# Altium PCB Export_PCB.PcbDoc (part 4 of 7)
Units mm, origin at the board's own origin, x right, y up, seen from the top; angles counter-clockwise.
Board outline 93 x 90 mm, 6 copper layers (Top_1, GND_2, SIGNAL_3, PWR_4, GND_5, Bottom_6), stack 1.606 mm thick; 470 components, 374 nets, 2145 pads, 1031 vias.
Unrouted connection lines stored in the file: 451.
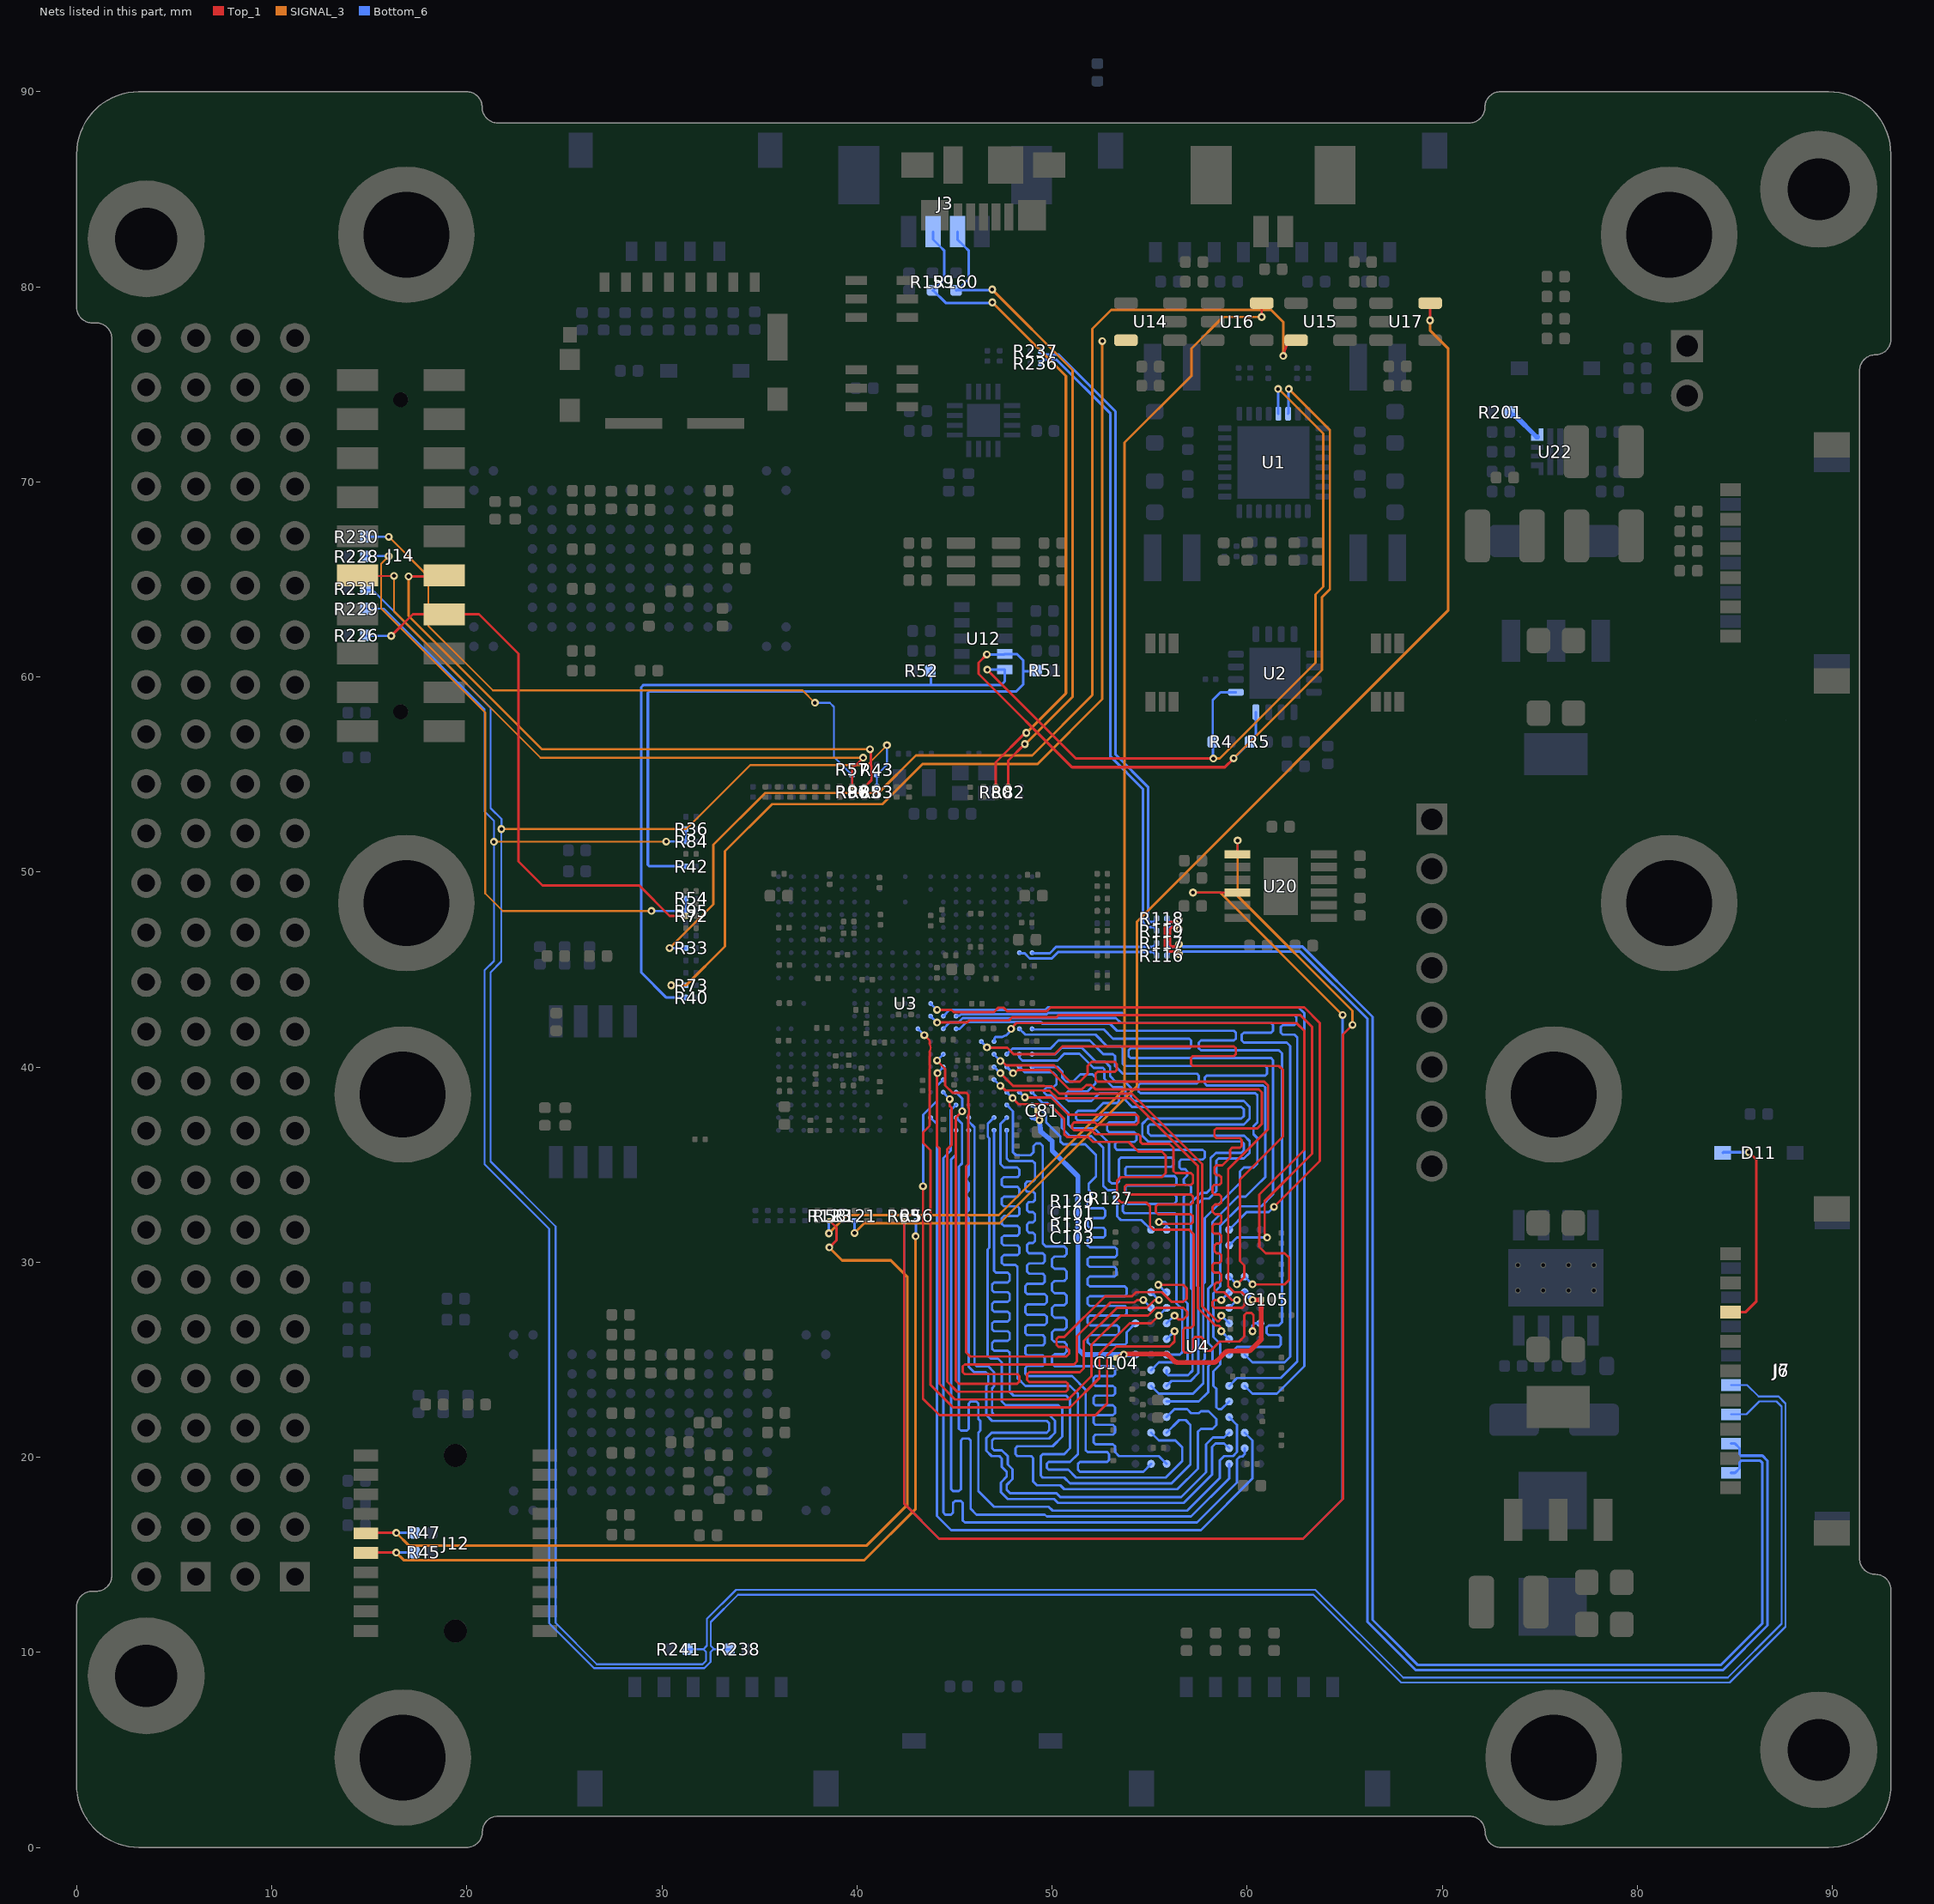
[diagram p6: the nets of this part, all layers, seen from the top]

## Via types
v1: diameter 0.4, hole 0.2, Top_1 to Bottom_6, 870 vias
v2: diameter 0.4, hole 0.2, Top_1 to Bottom_6, tented both sides, 160 vias
v3: diameter 0.4, hole 0.15, Top_1 to Bottom_6, 1 vias

## Nets (pads, with @x,y where several pads share a name; then routed paths per layer and width w, separated by ;. In a path a pad name is that pad's centre, name@x,y a point inside that pad or via, vN(x,y) a via of type N, cw(c..) or ccw(c..) an arc to the next point about the centre after c; other vN are vias at no path point) (continued)
DDR_A10: U3.T3 U4.L7 | length 34.1
  Top_1 w0.125: v1(48.003,39.687) 48.084,39.687 48.245,39.847 49.893,39.847 50.878,38.862 51.528,38.862 51.753,39.087 52.003,39.087 52.228,38.862 60.603,38.862 60.753,38.712 60.753,37.087 60.528,36.862 58.428,36.862 58.328,36.762 58.328,36.462 58.428,36.362 59.628,36.362 59.728,36.262 59.728,35.962 59.628,35.862 59.228,35.862 59.128,35.762 59.128,35.362 58.728,34.962 58.428,34.962 58.328,34.862 58.328,34.562 58.428,34.462 58.578,34.462 58.678,34.362 58.678,34.062 58.578,33.962 58.328,33.962 58.228,33.862 58.228,33.562 58.328,33.462 58.578,33.462 58.678,33.362 58.678,33.062 58.578,32.962 58.428,32.962 58.353,32.962 58.228,32.837 58.228,32.587 58.353,32.462 58.578,32.462 58.678,32.362 58.678,32.062 58.578,31.962 58.328,31.962 58.228,31.862 58.228,31.562 58.328,31.462 58.578,31.462 58.678,31.362 58.678,31.062 58.578,30.962 58.428,30.962 58.328,30.862 58.328,30.562 58.428,30.462 58.578,30.462 58.678,30.362 58.678,30.062 58.578,29.962 58.328,29.962 58.228,29.862 58.228,29.562 58.328,29.462 58.578,29.462 58.678,29.362 58.678,29.062 58.578,28.962 58.428,28.962 58.328,28.862 58.328,28.562 58.428,28.462 58.828,28.462 59.228,28.062 v1(59.478,28.062)
  Bottom_6 w0.125: U3.T3@47.678,40.012 v1(48.003,39.687) ; U4.L7@59.078,27.662 v1(59.478,28.062)
DDR_A11: U3.M9 U4.R7 | length 34.1
  Top_1 w0.125: v1(44.103,42.287) 45.658,42.287 45.765,42.393 47.784,42.393 47.953,42.562 50.228,42.562 50.328,42.662 62.728,42.662 63.328,42.062 63.328,35.562 60.897,33.131 60.897,31.471 61.028,31.339 v1(61.028,31.262)
  Bottom_6 w0.125: U3.M9@43.778,42.612 v1(44.103,42.287) ; U4.R7@59.078,30.862 59.478,31.262 v1(61.028,31.262)
DDR_A12: U3.P5 U4.N7 | length 34.1
  Top_1 w0.125: v1(46.664,41.013) 46.69,40.987 47.703,40.987 48.028,40.662 50.128,40.662 50.528,41.062 59.328,41.062 59.428,40.962 59.428,40.662 59.328,40.562 57.228,40.562 57.128,40.462 57.128,40.162 57.228,40.062 61.628,40.062 61.828,39.862 61.828,36.437 59.628,34.237 59.628,30.062 59.853,29.837 59.853,29.237 v1(59.478,28.862)
  Bottom_6 w0.125: U3.P5@46.378,41.312 46.378,41.305 46.664,41.02 v1(46.664,41.013) ; U4.N7@59.078,29.262 v1(59.478,28.862)
DDR_A13: U3.V2 U4.T3 | length 34
  Top_1 w0.125: v1(48.61,38.452) 48.623,38.438 49.952,38.438 50.654,37.736 50.828,37.562 54.328,37.562 54.428,37.462 54.428,37.162 54.328,37.062 52.303,37.062 52.203,37.162 51.128,37.162 51.028,37.062 51.028,36.862 51.128,36.762 52.028,36.762 52.228,36.562 54.428,36.562 54.528,36.462 54.528,36.162 54.628,36.062 56.028,36.062 56.228,35.862 56.228,34.662 56.328,34.562 57.128,34.562 57.228,34.462 57.228,34.062 57.128,33.962 53.828,33.962 53.728,33.862 53.728,33.562 53.828,33.462 57.128,33.462 57.228,33.362 57.228,33.062 57.128,32.962 55.428,32.962 55.328,32.862 55.328,32.562 55.428,32.462 57.128,32.462 57.228,32.362 57.228,32.062 57.128,31.962 55.578,31.962 v1(55.478,32.062)
  Bottom_6 w0.125: U3.V2@48.328,38.712 48.339,38.712 48.599,38.452 v1(48.61,38.452) ; v1(55.478,32.062) 55.803,32.062 55.878,31.987 U4.T3@55.878,31.662
DDR_A14: U3.L9 U4.T7 | length 33.9
  Top_1 w0.125: v1(44.103,42.937) 44.853,42.937 44.972,42.818 47.026,42.818 47.262,43.054 47.51,43.054 47.702,42.862 49.728,42.862 49.928,43.062 62.928,43.062 63.728,42.262 63.728,35.187 v1(61.378,32.837)
  Bottom_6 w0.125: U3.L9@43.778,43.262 v1(44.103,42.937) ; U4.T7@59.078,31.662 59.978,32.562 61.103,32.562 v1(61.378,32.837)
DDR_A15: U3.R4 U4.M7 | length 34.1
  Top_1 w0.125: v1(47.353,40.311) 47.421,40.311 47.643,40.088 50.102,40.088 50.928,39.262 51.428,39.262 51.828,39.662 51.828,40.062 52.028,40.262 53.228,40.262 53.325,40.165 53.325,39.859 53.228,39.762 52.328,39.762 52.228,39.662 52.228,39.362 52.328,39.262 60.878,39.262 61.078,39.062 61.078,36.812 59.028,34.762 59.028,28.762 59.328,28.462 59.728,28.462 59.878,28.312 59.878,27.787 59.753,27.662 58.328,27.662 58.228,27.762 58.228,27.962 58.328,28.062 v1(58.678,28.062)
  Bottom_6 w0.125: U3.R4@47.028,40.662 47.028,40.649 47.353,40.324 v1(47.353,40.311) ; v1(58.678,28.062) U4.M7@59.078,28.462
DDR_BA0: U3.V8 U4.M2 | length 34
  Top_1 w0.125: v1(44.754,38.362) 44.753,38.36 44.753,38.012 44.853,37.912 44.853,36.012 44.628,35.787 44.628,23.88 45.146,23.362 50.71,23.362 50.81,23.462 50.81,23.78 50.728,23.862 48.828,23.862 48.728,23.962 48.728,24.262 48.828,24.362 51.428,24.362 51.628,24.562 51.628,25.962 53.328,27.662 54.853,27.662 55.253,28.062 v1(55.478,28.062)
  Bottom_6 w0.125: U3.V8@44.428,38.712 44.428,38.697 44.724,38.401 v1@44.799,38.401 ; U4.M2@55.078,28.462 v1(55.478,28.062)
DDR_BA1: U3.P4 U4.N8 | length 34.1
  Top_1 w0.125: v1(47.902,41.961) 47.902,41.986 48.178,42.262 62.528,42.262 62.928,41.862 62.928,35.762 60.628,33.462 60.628,30.787 60.953,30.462 61.928,30.462 62.153,30.237 62.153,29.087 61.928,28.862 v1(60.278,28.862)
  Bottom_6 w0.125: U3.P4@47.028,41.312 47.045,41.329 47.045,41.484 47.103,41.543 47.427,41.543 47.66,41.637 47.731,41.708 ; 47.731,41.709 47.902,41.88 v1(47.902,41.961) ; U4.N8@59.878,29.262 v1(60.278,28.862)
DDR_BA2: U3.R8 U4.M3 | length 33.8
  Top_1 w0.125: v1(44.103,40.337) 44.524,39.916 44.524,39.061 44.902,38.682 45.608,38.682 45.714,38.576 45.714,37.912 45.743,37.883 45.743,37.593 45.714,37.564 45.714,35.033 45.603,34.921 45.603,34.801 45.603,25.369 45.81,25.162 50.728,25.162 50.878,25.312 50.878,25.512 50.728,25.662 50.328,25.662 50.228,25.762 50.228,26.062 50.328,26.162 50.628,26.162 52.728,28.262 54.103,28.262 54.303,28.462 55.628,28.462 56.128,27.962 56.728,27.962 56.903,28.137 56.903,28.662 56.728,28.837 v1(55.453,28.837)
  Bottom_6 w0.125: v1(44.103,40.337) U3.R8@44.428,40.662 ; v1(55.453,28.837) U4.M3@55.853,28.437
DDR_CAS: U3.T8 U4.K3 | length 34
  Top_1 w0.125: v1(44.132,39.689) 44.103,39.66 44.103,35.962 44.228,35.837 44.228,23.762 45.028,22.962 50.828,22.962 52.028,24.162 52.028,25.762 53.528,27.262 54.928,27.262 55.328,27.662 56.728,27.662 56.928,27.462 56.928,27.262 56.728,27.062 56.478,27.062 v1(56.278,27.262)
  Bottom_6 w0.125: v1(44.132,39.689) 44.132,39.703 44.428,39.999 U3.T8@44.428,40.012 ; U4.K3@55.878,26.862 v1(56.278,27.262)
DDR_CK_N: U3.T4 U4.K7 | length 22.1
  Top_1 w0.125: v1(47.353,39.687) 48.01,39.03 49.604,39.03 49.606,39.028 49.968,39.028 49.998,38.998 50.008,38.998 50.369,38.637 50.654,38.637 50.658,38.633 54.096,38.633 57.705,35.024 57.705,27.739 58.468,26.975 58.551,26.975 58.621,27.045 58.621,27.205 v1(58.678,27.262)
  Bottom_6 w0.125: U3.T4@47.028,40.012 v1(47.353,39.687) ; v1(58.678,27.262) U4.K7@59.078,26.862
DDR_CK_P: U3.U4 U4.J7 | length 21.9
  Top_1 w0.125: v1(47.353,39.037) 47.379,39.037 47.614,38.803 49.51,38.803 49.512,38.801 49.874,38.801 50.272,38.403 50.654,38.403 50.658,38.406 54.002,38.406 57.478,34.93 57.478,27.645 58.374,26.748 58.551,26.748 58.621,26.679 58.621,26.519 v1(58.678,26.462)
  Bottom_6 w0.125: U3.U4@47.028,39.362 v1(47.353,39.037) v1@47.378,39.037 ; v1(58.678,26.462) U4.J7@59.078,26.062
DDR_CKE: U3.V3 U4.K9 | length 34
  Top_1 w0.125: v1(47.978,38.412) 48.289,38.101 49.887,38.101 50.039,37.949 50.039,37.926 50.628,37.337 50.628,36.562 50.778,36.412 51.853,36.412 52.103,36.162 53.928,36.162 54.428,35.662 55.628,35.662 55.828,35.462 55.828,34.562 55.628,34.362 53.528,34.362 53.328,34.162 53.328,33.262 53.528,33.062 54.828,33.062 55.028,32.862 55.028,31.837 55.203,31.662 57.028,31.662 57.253,31.437 57.253,26.762 57.128,26.637 56.828,26.637 56.728,26.537 56.728,25.462 56.828,25.362 57.128,25.362 57.228,25.462 57.228,26.062 57.328,26.162 57.653,26.162 57.753,26.062 57.753,25.587 57.878,25.462 58.128,25.462 58.603,25.937 59.603,25.937 59.853,26.187 59.853,27.276 59.969,27.392 60.223,27.392 60.328,27.287 60.328,26.512 v1(60.278,26.462)
  Bottom_6 w0.125: U3.V3@47.678,38.712 v1(47.978,38.412) ; v1(60.278,26.462) 60.278,26.762 60.378,26.862 U4.K9@60.678,26.862
DDR_CS: U3.V7 U4.L2 | length 34
  Top_1 w0.125: v1(45.392,37.738) 45.074,37.421 45.074,23.916 45.228,23.762 48.203,23.762 48.328,23.887 48.328,24.162 48.228,24.262 45.528,24.262 45.428,24.362 45.428,24.662 45.528,24.762 51.128,24.762 51.278,24.912 51.278,26.212 53.003,27.937 54.228,27.937 54.353,28.062 v1(54.678,28.062)
  Bottom_6 w0.125: U3.V7@45.078,38.712 45.4,38.39 45.4,37.746 v1(45.392,37.738) ; v1(54.678,28.062) U4.L2@55.078,27.662
DDR_D0: U3.N2 U4.E3 | length 40.6
  Bottom_6 w0.125: U3.N2@48.328,41.962 48.628,41.662 49.828,41.662 52.228,41.662 52.828,41.062 53.528,41.062 53.628,40.962 53.628,40.162 53.728,40.062 60.928,40.062 61.028,39.962 61.028,39.662 60.928,39.562 57.928,39.562 57.828,39.462 57.828,39.162 57.928,39.062 60.828,39.062 60.928,38.962 60.928,34.362 60.428,33.862 59.928,33.362 59.528,33.362 58.228,32.062 58.228,28.862 58.003,28.637 58.003,25.862 58.228,25.637 58.228,24.887 58.003,24.662 58.003,23.337 57.528,22.862 U4.E3@55.878,22.862
DDR_D1: U3.M7 U4.F7 | length 40.7
  Bottom_6 w0.125: U3.M7@45.078,42.612 45.107,42.641 45.272,42.641 45.346,42.714 49.73,42.714 49.795,42.779 49.995,42.779 53.611,42.779 53.728,42.662 62.428,42.662 62.528,42.562 62.528,42.262 62.428,42.162 61.828,42.162 61.728,42.062 61.728,41.762 61.828,41.662 62.428,41.662 62.571,41.519 62.571,24.905 61.728,24.062 59.478,24.062 U4.F7@59.078,23.662
DDR_D2: U3.R3 U4.F2 | length 40.6
  Bottom_6 w0.125: U3.R3@47.678,40.662 47.969,40.953 49.919,40.953 50.328,41.362 51.928,41.362 52.628,40.662 53.128,40.662 53.228,40.562 53.228,40.062 53.628,39.662 57.428,39.662 57.528,39.562 57.528,39.262 57.428,39.162 54.528,39.162 54.428,39.062 54.428,38.762 54.528,38.662 60.428,38.662 60.528,38.562 60.528,37.162 60.328,36.962 60.328,36.562 60.528,36.362 60.528,35.062 60.328,34.862 59.828,34.862 59.628,34.662 59.628,34.062 57.828,32.262 57.828,28.962 57.753,28.887 57.753,25.537 57.828,25.462 57.828,25.037 57.753,24.962 57.753,23.787 57.228,23.262 55.478,23.262 U4.F2@55.078,23.662
DDR_D3: U3.M8 U4.F8 | length 40.7
  Bottom_6 w0.125: U3.M8@44.428,42.612 44.74,42.924 49.64,42.924 49.777,43.062 62.628,43.062 62.928,42.762 62.928,24.662 61.528,23.262 60.278,23.262 U4.F8@59.878,23.662
DDR_D4: U3.T2 U4.H3 | length 40.7
  Bottom_6 w0.125: U3.T2@48.328,40.012 48.612,39.728 50.044,39.728 50.228,39.544 50.228,39.122 50.068,38.962 49.728,38.962 49.603,38.837 49.603,38.687 49.728,38.562 49.928,38.562 50.828,37.662 50.828,37.062 51.028,36.862 52.178,36.862 52.928,36.112 52.928,34.162 53.053,34.037 53.328,34.037 53.428,34.137 53.428,35.262 53.528,35.362 56.128,35.362 56.228,35.262 56.228,34.987 56.128,34.887 53.828,34.887 53.753,34.812 53.753,34.487 53.828,34.412 56.278,34.412 56.378,34.312 56.378,34.037 56.278,33.937 53.828,33.937 53.753,33.862 53.753,33.537 53.828,33.462 56.278,33.462 56.378,33.362 56.378,33.112 56.278,33.012 ; U4.H3@55.878,25.262 56.553,25.262 56.678,25.387 56.678,27.587 56.378,27.887 56.378,32.412 56.278,32.512 53.728,32.512 53.628,32.612 53.628,32.887 53.728,32.987 56.278,32.987
DDR_D5: U3.N8 U4.H8 | length 40.7
  Bottom_6 w0.125: U3.N8@44.428,41.962 44.753,42.287 45.203,42.287 45.429,42.513 49.977,42.513 49.978,42.512 53.278,42.512 53.528,42.262 61.228,42.262 61.328,42.162 61.328,41.862 61.228,41.762 59.828,41.762 59.728,41.662 59.728,41.362 59.828,41.262 62.028,41.262 62.213,41.077 62.213,25.147 61.928,24.862 60.278,24.862 U4.H8@59.878,25.262
DDR_D6: U3.T1 U4.G2 | length 40.7
  Bottom_6 w0.125: U3.T1@48.982,40.008 50.307,40.008 50.528,39.787 50.528,39.462 50.728,39.262 51.078,39.262 51.453,39.637 52.078,39.637 52.228,39.487 52.228,39.162 51.828,38.762 50.828,38.762 50.728,38.662 50.728,38.362 50.828,38.262 52.028,38.262 52.428,38.662 53.328,38.662 53.428,38.562 53.428,38.262 53.328,38.162 52.628,38.162 52.228,37.762 51.328,37.762 51.228,37.662 51.228,37.362 51.328,37.262 52.328,37.262 52.728,37.662 54.228,37.662 54.328,37.562 54.328,37.262 54.228,37.162 52.928,37.162 52.828,37.062 52.828,36.762 52.928,36.662 54.228,36.662 54.328,36.562 54.328,36.262 54.228,36.162 53.328,36.162 53.228,36.062 53.228,35.862 53.328,35.762 57.728,35.762 57.828,35.662 57.828,35.362 57.728,35.262 56.628,35.262 56.528,35.162 56.528,34.862 56.628,34.762 56.828,34.762 56.928,34.662 56.928,34.437 56.753,34.262 56.753,34.062 56.853,33.962 57.028,33.962 57.128,33.862 57.128,33.562 57.028,33.462 56.853,33.462 56.753,33.362 56.753,28.087 56.953,27.887 56.953,24.987 56.828,24.862 55.478,24.862 U4.G2@55.078,24.462
DDR_D7: U3.N7 U4.H7 | length 40.7
  Bottom_6 w0.125: U3.N7@45.078,41.962 45.272,41.962 45.622,42.312 49.428,42.312 49.441,42.299 49.528,42.212 52.978,42.212 53.328,41.862 59.328,41.862 59.428,41.762 59.428,41.462 59.328,41.362 57.628,41.362 57.528,41.262 57.528,40.962 57.628,40.862 61.628,40.862 61.789,40.701 61.789,26.923 61.628,26.762 61.103,26.762 61.003,26.662 61.003,26.362 61.103,26.262 61.628,26.262 61.728,26.162 61.728,25.762 61.628,25.662 59.478,25.662 U4.H7@59.078,25.262
DDR_D8: U3.Y7 U4.D7 | length 40.6
  Bottom_6 w0.125: U3.Y7@45.078,37.412 45.391,37.099 45.391,35.062 45.228,34.899 45.228,21.462 45.328,21.362 45.628,21.362 45.728,21.462 45.728,22.762 45.828,22.862 46.128,22.862 46.228,22.762 46.228,21.962 46.328,21.862 46.328,21.362 46.228,21.262 46.228,18.262 46.628,17.862 47.028,17.462 49.828,17.462 50.028,17.262 56.928,17.262 58.603,18.937 58.603,19.837 58.828,20.062 59.278,20.062 59.478,20.262 59.478,21.662 U4.D7@59.078,22.062
DDR_D9: U3.AA4 U4.C3 | length 40.6
  Bottom_6 w0.125: U3.AA4@47.028,36.762 47.028,29.562 47.128,29.462 47.728,29.462 47.828,29.362 47.828,29.062 47.728,28.962 47.028,28.962 46.928,28.862 46.928,28.562 47.028,28.462 47.728,28.462 47.828,28.362 47.828,28.062 47.728,27.962 47.028,27.962 46.928,27.862 46.928,27.562 47.028,27.462 47.728,27.462 47.828,27.362 47.828,27.062 47.728,26.962 47.028,26.962 46.928,26.862 46.928,26.562 47.028,26.462 47.728,26.462 47.828,26.362 47.828,26.062 47.728,25.962 47.028,25.962 46.928,25.862 46.928,25.562 47.028,25.462 47.728,25.462 47.828,25.362 47.828,23.362 48.028,23.162 50.728,23.162 50.928,22.962 50.928,20.462 50.628,20.162 49.528,20.162 49.428,20.062 49.428,19.062 49.528,18.962 50.628,18.962 50.928,18.662 56.128,18.662 57.097,19.631 57.097,21.662 56.853,21.906 56.522,21.906 U4.C3@55.878,21.262
DDR_D10: U3.Y9 U4.C8 | length 40.6
  Bottom_6 w0.125: U3.Y9@43.778,37.412 44.103,37.087 44.103,16.987 44.828,16.262 57.628,16.262 60.278,18.912 60.278,20.862 U4.C8@59.878,21.262
DDR_D11: U3.Y3 U4.C2 | length 40.7
  Bottom_6 w0.125: U3.Y3@47.678,37.412 47.353,37.087 47.353,35.037 47.538,34.852 48.223,34.852 48.328,34.747 48.328,34.462 48.228,34.362 47.528,34.362 47.428,34.262 47.428,33.962 47.528,33.862 48.228,33.862 48.328,33.762 48.328,33.462 48.228,33.362 47.528,33.362 47.428,33.262 47.428,32.962 47.528,32.862 48.228,32.862 48.328,32.762 48.328,32.462 48.228,32.362 47.528,32.362 47.428,32.262 47.428,31.962 47.528,31.862 48.228,31.862 48.328,31.762 48.328,31.462 48.228,31.362 47.528,31.362 47.428,31.262 47.428,30.962 47.528,30.862 48.228,30.862 48.328,30.762 48.328,30.462 48.228,30.362 47.528,30.362 47.428,30.262 47.428,29.962 47.528,29.862 48.128,29.862 48.228,29.762 48.228,24.062 48.628,23.662 50.928,23.662 51.328,23.262 51.328,20.162 50.928,19.762 49.828,19.762 49.728,19.662 49.728,19.462 49.828,19.362 50.828,19.362 51.228,18.962 55.828,18.962 56.678,19.812 56.678,20.512 56.321,20.869 55.471,20.869 U4.C2@55.078,21.262
DDR_D12: U3.AA7 U4.A7 | length 40.6
  Bottom_6 w0.125: U3.AA7@45.078,36.762 45.078,35.512 44.828,35.262 44.828,18.362 44.928,18.262 45.228,18.262 45.328,18.362 45.328,20.862 45.428,20.962 45.728,20.962 45.828,20.862 45.828,17.362 46.128,17.062 49.628,17.062 49.728,16.962 57.128,16.962 59.078,18.912 U4.A7@59.078,19.662
DDR_D13: U3.AA3 U4.A2 | length 40.7
  Bottom_6 w0.125: U3.AA3@47.678,36.762 47.678,35.312 47.803,35.187 49.003,35.187 49.128,35.062 49.128,34.242 49.023,34.137 48.733,34.137 48.628,34.032 48.628,33.717 48.733,33.612 49.023,33.612 49.128,33.507 49.128,33.192 49.023,33.087 48.823,33.087 48.718,32.982 48.718,32.667 48.823,32.562 49.023,32.562 49.128,32.457 49.128,32.142 49.023,32.037 48.823,32.037 48.718,31.932 48.718,31.617 48.823,31.512 49.023,31.512 49.128,31.407 49.128,31.092 49.023,30.987 48.823,30.987 48.718,30.882 48.718,30.567 48.823,30.462 49.523,30.462 49.628,30.357 49.628,30.042 49.523,29.937 48.828,29.937 48.723,29.832 48.723,29.517 48.828,29.412 49.523,29.412 49.628,29.307 49.628,28.992 49.523,28.887 48.733,28.887 48.628,28.782 48.628,28.467 48.733,28.362 49.623,28.362 49.728,28.257 49.728,27.942 49.623,27.837 48.733,27.837 48.628,27.732 48.628,27.417 48.733,27.312 49.623,27.312 49.728,27.207 49.728,26.892 49.623,26.787 48.733,26.787 48.628,26.682 48.628,26.367 48.733,26.262 49.523,26.262 49.628,26.157 49.628,25.842 49.523,25.737 48.733,25.737 48.628,25.632 48.628,25.317 48.733,25.212 49.523,25.212 49.628,25.107 49.628,24.792 49.523,24.687 48.733,24.687 48.628,24.582 48.628,24.267 48.733,24.162 51.028,24.162 51.728,23.462 51.728,20.362 51.828,20.262 52.828,20.262 52.928,20.162 52.928,19.862 52.828,19.762 51.428,19.762 51.328,19.662 51.328,19.362 51.428,19.262 54.678,19.262 U4.A2@55.078,19.662
DDR_D14: U3.W7 U4.B8 | length 40.7
  Bottom_6 w0.125: U3.W7@45.078,38.062 44.805,37.789 44.805,37.529 44.802,37.526 44.802,36.622 44.805,36.619 44.805,35.714 44.428,35.337 44.428,17.162 44.528,17.062 44.828,17.062 44.928,17.162 44.928,17.662 45.028,17.762 45.328,17.762 45.428,17.662 45.428,16.762 45.528,16.662 57.428,16.662 59.478,18.712 59.478,19.887 59.628,20.037 59.753,20.037 59.878,20.162 U4.B8@59.878,20.462
DDR_D15: U3.W3 U4.A3 | length 40.7
  Bottom_6 w0.125: U3.W3@47.678,38.062 48.003,37.737 48.003,35.637 48.158,35.482 48.898,35.482 49.053,35.637 49.053,35.962 49.178,36.087 49.403,36.087 49.528,35.962 49.528,30.962 49.678,30.812 50.628,30.812 50.753,30.687 50.753,30.412 50.628,30.287 50.128,30.287 50.003,30.162 50.003,29.787 50.128,29.662 50.628,29.662 50.753,29.537 50.753,29.162 50.628,29.037 50.128,29.037 50.003,28.912 50.003,28.537 50.128,28.412 50.628,28.412 50.753,28.287 50.753,27.912 50.628,27.787 50.128,27.787 50.003,27.662 50.003,27.287 50.128,27.162 50.628,27.162 50.753,27.037 50.753,26.662 50.628,26.537 50.128,26.537 50.003,26.412 50.003,26.037 50.128,25.912 50.628,25.912 50.753,25.787 50.753,25.412 50.628,25.287 50.128,25.287 50.003,25.162 50.003,24.787 50.128,24.662 53.128,24.662 53.228,24.562 53.228,24.262 53.128,24.162 52.228,24.162 52.128,24.062 52.128,23.762 52.228,23.662 53.128,23.662 53.228,23.562 53.228,23.262 53.128,23.162 52.228,23.162 52.128,23.062 52.128,22.762 52.228,22.662 53.128,22.662 53.228,22.562 53.228,22.262 53.128,22.162 52.228,22.162 52.128,22.062 52.128,21.762 52.228,21.662 53.128,21.662 53.228,21.562 53.228,21.262 53.128,21.162 52.228,21.162 52.128,21.062 52.128,20.762 52.228,20.662 53.128,20.662 53.228,20.562 53.228,20.262 53.428,20.062 55.478,20.062 U4.A3@55.878,19.662
DDR_DQM0: U3.N1 U4.E7 | length 40.7
  Bottom_6 w0.125: U3.N1@48.978,41.962 49.011,41.929 52.661,41.929 53.128,41.462 57.028,41.462 57.128,41.362 57.128,41.062 57.028,40.962 54.028,40.962 53.928,40.862 53.928,40.562 54.028,40.462 61.228,40.462 61.328,40.362 61.328,33.462 60.728,32.862 59.628,32.862 58.628,31.862 58.628,28.762 58.278,28.412 58.278,26.162 58.628,25.812 58.628,24.762 58.278,24.412 58.278,23.662 58.428,23.512 58.428,22.562 58.528,22.462 58.678,22.462 U4.E7@59.078,22.862
DDR_DQM1: U3.Y4 U4.D3 | length 40.4
  Bottom_6 w0.125: U3.Y4@47.028,37.412 47.014,37.412 46.709,37.107 46.709,36.433 46.793,36.349 46.793,30.747 46.703,30.656 46.703,25.211 46.852,25.062 47.228,25.062 47.428,24.862 47.428,22.862 47.628,22.662 50.328,22.662 50.528,22.462 50.528,21.062 50.028,20.562 48.228,20.562 48.128,20.462 48.128,20.162 48.228,20.062 48.928,20.062 49.028,19.962 49.028,18.762 49.228,18.562 50.428,18.562 50.628,18.362 56.428,18.362 57.478,19.412 57.478,21.312 57.628,21.462 58.228,21.462 58.428,21.662 58.428,21.962 58.028,22.362 57.628,22.362 57.528,22.262 57.128,22.262 56.928,22.462 56.278,22.462 U4.D3@55.878,22.062
DDR_DQS0_N: U3.R2 U4.G3 | length 40.7
  Bottom_6 w0.125: U3.R2@48.328,40.662 48.328,40.487 48.478,40.337 50.278,40.337 50.628,40.687 51.404,40.687 52.129,39.962 52.604,39.962 52.678,39.888 52.678,39.413 53.128,38.963 53.603,38.963 53.753,38.813 53.753,38.313 54.104,37.962 59.704,37.962 59.828,37.838 59.828,37.486 59.704,37.362 54.904,37.362 54.628,37.086 54.628,36.486 54.928,36.186 59.728,36.186 59.828,36.086 59.828,35.735 59.704,35.611 58.404,35.611 58.128,35.335 58.128,33.762 57.928,33.562 57.628,33.562 57.128,33.062 57.128,28.662 57.203,28.587 57.203,24.437 56.978,24.212 55.953,24.212 55.878,24.287 U4.G3@55.878,24.462
DDR_DQS0_P: U3.R1 U4.F3 | length 40.7
  Bottom_6 w0.125: U3.R1@48.978,40.662 50.179,40.662 50.504,40.987 51.528,40.987 52.253,40.262 52.728,40.262 52.978,40.012 52.978,39.537 53.252,39.263 53.727,39.263 54.053,38.937 54.053,38.437 54.228,38.262 59.828,38.262 60.128,37.962 60.128,37.362 59.828,37.062 55.028,37.062 54.928,36.962 54.928,36.611 55.052,36.486 59.852,36.486 60.128,36.211 60.128,35.611 59.828,35.311 58.528,35.311 58.428,35.211 58.428,33.638 58.052,33.262 57.752,33.262 57.428,32.938 57.428,28.786 57.503,28.711 57.503,24.313 57.102,23.912 56.128,23.912 U4.F3@55.878,23.662
DDR_DQS1_N: U3.AA6 U4.B7 | length 40.5
  Bottom_6 w0.125: U3.AA6@45.728,36.762 45.728,34.462 45.628,34.362 45.628,34.162 45.728,34.062 45.728,33.662 45.628,33.562 45.628,33.362 45.728,33.262 45.728,32.662 45.628,32.562 45.628,32.362 45.728,32.262 45.728,24.638 46.004,24.362 46.604,24.362 46.728,24.238 46.728,23.762 46.628,23.662 46.628,22.162 46.928,21.862 49.74,21.862 49.852,21.75 49.852,21.386 49.728,21.262 46.904,21.262 46.628,20.986 46.628,20.338 46.904,20.062 47.304,20.062 47.428,19.938 47.428,19.513 47.678,19.263 47.678,19.011 47.378,18.711 47.378,18.212 47.728,17.862 50.102,17.862 50.302,17.662 56.752,17.662 58.203,19.113 58.203,20.537 58.378,20.712 58.828,20.712 U4.B7@59.078,20.462
DDR_DQS1_P: U3.Y6 U4.C7 | length 40.5
  Bottom_6 w0.125: U3.Y6@45.728,37.412 45.728,37.212 46.028,36.912 46.028,24.762 46.128,24.662 46.728,24.662 47.028,24.362 47.028,23.638 46.928,23.538 46.928,22.286 47.052,22.162 49.864,22.162 50.152,21.874 50.152,21.261 49.852,20.962 47.028,20.962 46.928,20.862 46.928,20.462 47.028,20.362 47.428,20.362 47.728,20.062 47.728,19.637 47.978,19.387 47.978,18.887 47.678,18.587 47.678,18.336 47.852,18.162 50.227,18.162 50.427,17.962 56.628,17.962 57.903,19.237 57.903,20.661 58.254,21.012 58.828,21.012 U4.C7@59.078,21.262
DDR_ODT: U3.W1 U4.K1 | length 37
  Bottom_6 w0.125: U3.W1@48.978,38.062 49.278,37.762 49.503,37.762 49.703,37.562 49.703,37.162 50.428,36.437 50.428,36.187 50.578,36.037 51.703,36.037 52.253,35.487 52.253,34.387 51.878,34.012 51.878,33.712 52.028,33.562 52.028,33.362 51.828,33.162 51.828,32.862 51.928,32.762 52.128,32.762 52.628,32.762 52.728,32.662 52.728,32.362 52.628,32.262 51.928,32.262 51.828,32.162 51.828,31.862 51.928,31.762 52.628,31.762 52.728,31.662 52.728,31.362 52.628,31.262 51.928,31.262 51.828,31.162 51.828,30.862 51.928,30.762 53.228,30.762 53.328,30.662 53.328,30.362 53.228,30.262 51.928,30.262 51.828,30.162 51.828,29.862 51.928,29.762 53.198,29.762 53.298,29.662 53.298,29.362 53.198,29.262 51.928,29.262 51.828,29.162 51.828,28.862 51.928,28.762 53.728,28.762 53.828,28.662 53.828,28.362 53.728,28.262 51.928,28.262 51.828,28.162 51.828,27.862 51.928,27.762 53.728,27.762 53.828,27.662 53.828,27.362 53.728,27.262 51.928,27.262 51.828,27.162 51.828,26.887 51.953,26.762 53.328,26.762 53.428,26.662 53.428,26.362 53.328,26.262 51.928,26.262 51.828,26.162 51.828,25.887 51.953,25.762 53.728,25.762 53.828,25.862 53.828,26.412 U4.K1@54.278,26.862
DDR_RAS: U3.U8 U4.J3 | length 34.1
  Top_1 w0.125: v1(43.389,33.892) 43.389,23.001 44.228,22.162 52.228,22.162 52.828,22.762 52.828,25.212 53.303,25.687 56.028,25.687 56.278,25.937 v1(56.278,26.462)
  Bottom_6 w0.125: v1(43.389,33.892) 43.401,33.904 43.401,37.56 44.103,38.262 44.103,39.037 U3.U8@44.428,39.362 ; U4.J3@55.878,26.062 v1(56.278,26.462)
DDR_RESET: R127.1 U3.V1 U4.T2 | length 11.2
  Bottom_6 w0.125: U3.V1@48.978,38.712 49.528,38.162 49.778,38.162 50.503,37.437 50.503,36.887 50.928,36.462 52.028,36.462 52.628,35.862 52.628,33.916 52.857,33.687 53.253,33.687 53.34,33.6 53.34,33.362 53.34,32.35 53.528,32.162 54.578,32.162 U4.T2@55.078,31.662
DDR_VREF: C81.1 C101.1 C103.2 C104.1 C105.1 R129.1 R130.2 U3.Y1 U4.H1 U4.M8 | length 27.7
  Top_1 w0.25: C81.1@49.226,37.776 49.212,37.749 v1(49.353,37.287) ; C104.1@53.286,25.103 v1(53.678,25.262) cw(c53.803,25.045) 53.802,25.295 55.8,25.295 cw(c55.8,25.045) 55.977,25.222 56.265,24.935 ccw(c56.441,25.112) 56.441,24.862 58.266,24.862 ccw(c58.266,25.112) 58.442,24.935 58.879,25.371 cw(c59.055,25.194) 59.055,25.444 60.036,25.444 ccw(c60.036,25.694) 60.213,25.517 60.658,25.962 ccw(c60.48,26.138) 60.73,26.138 C105.1@60.73,28.083 60.718,28.062 v1(60.278,28.062)
  Bottom_6 w0.25: U3.Y1@48.978,37.412 v1(49.353,37.287) 49.428,36.687 50.005,36.212 50.005,35.728 51.328,34.404 51.328,33.112 51.328,32.537 51.328,31.962 51.328,31.387 C103.2@51.328,31.265 ; C103.2@51.327,31.265 51.327,31.182 51.328,31.181 51.328,25.543 51.609,25.262 U4.H1@54.278,25.262 ; U4.M8@59.878,28.462 v1(60.278,28.062)
DDR_WE: U3.N10 U4.L3 | length 34.2
  Top_1 w0.1: 43.703,36.962 ccw(c43.632,37.033) 43.732,37.032 ; 43.703,41.387 cw(c43.632,41.317) 43.732,41.317 ; 43.732,38.421 ccw(c43.832,38.421) 43.733,38.411 cw(c43.385,38.374) 43.735,38.373 ; 43.732,40.796 cw(c43.832,40.796) 43.742,40.839 ccw(c43.427,40.992) 43.742,41.144 cw(c43.832,41.187) 43.732,41.187
  Top_1 w0.125: v1(43.453,41.637) 43.703,41.387 ; 43.703,36.962 43.401,36.66 43.401,36.114 43.778,35.737 43.778,23.712 44.928,22.562 50.928,22.562 52.428,24.062 52.428,25.312 53.978,26.862 55.078,26.862 v1(55.478,27.262) ; 43.732,41.317 43.732,41.187 ; 43.732,37.032 43.735,38.373 ; 43.732,38.421 43.732,40.796
  Bottom_6 w0.125: U3.N10@43.128,41.962 v1(43.453,41.637) ; v1(55.478,27.262) U4.L3@55.878,27.662
EXP_2_CONN_USB_N: R119.2 R236.1 | length 32.5
  Bottom_6 w0.134: R236.1@49.411,76.073 49.481,76.142 49.481,76.18 49.561,76.26 50.232,76.26 52.995,73.497 52.995,55.922 54.66,54.256 54.66,47.408 54.892,47.177 55.214,47.177 55.294,47.097 55.294,47.059 R119.2@55.364,46.99
EXP_2_CONN_USB_P: R118.2 R237.1 | length 32.5
  Bottom_6 w0.134: R237.1@49.411,76.708 49.481,76.639 49.481,76.601 49.561,76.521 50.34,76.521 50.858,76.004 50.949,75.912 53.256,73.605 53.256,56.03 54.922,54.364 54.922,47.517 55,47.438 55.214,47.438 55.294,47.518 55.294,47.556 R118.2@55.364,47.625
EXP_2_IF_USB_N: R117.2 U3.G1 | length 6.6
  Bottom_6 w0.134: U3.G1@48.978,45.862 49,45.84 49.082,45.84 49.091,45.831 49.885,45.831 50.222,46.169 55.177,46.169 55.282,46.273 55.293,46.273 55.364,46.343 R117.2@55.364,46.355
EXP_2_IF_USB_P: R116.2 U3.G2 | length 7.4
  Bottom_6 w0.134: U3.G2@48.328,45.862 48.35,45.84 48.587,45.84 48.857,45.57 49.993,45.57 50.33,45.908 55.179,45.908 55.284,45.802 55.293,45.802 55.364,45.732 R116.2@55.364,45.72
EXP_ON_IF: D11.2 J6.7 | length 10.7
  Top_1 w0.134: J6.7@84.783,27.435 85.545,27.435 86.112,28.001 86.112,35.249 v1(85.725,35.636)
  Bottom_6 w0.134: D11.2@84.379,35.598 84.417,35.636 v1(85.725,35.636)
EXP_USB_N: J7.8 R117.1 R119.1 | length 77.7
  Top_1 w0.134: v1(56.504,46.304) 56.432,46.304 56.303,46.175 56.136,46.175 56.057,46.254 56.057,47.087 56.147,47.177 56.324,47.177 56.443,47.058 v1(56.515,47.058)
  Bottom_6 w0.134: R117.1@55.888,46.355 55.958,46.286 55.958,46.255 56.038,46.175 56.303,46.175 56.432,46.304 v1@56.499,46.304 ; R119.1@55.888,46.99 55.958,47.059 55.958,47.097 56.038,47.177 56.324,47.177 ; v1(56.504,46.304) 56.576,46.304 56.705,46.175 62.839,46.175 66.437,42.577 66.437,11.668 67.564,10.541 68.759,9.346 84.276,9.346 86.416,11.486 86.416,19.714 86.31,19.82 85.321,19.82 85.242,19.741 85.242,19.434 85.009,19.201 J7.8@84.809,19.201
EXP_USB_P: J7.7 R116.1 R118.1 | length 79.5
  Top_1 w0.134: v1(56.504,45.785) 56.432,45.785 56.303,45.914 56.028,45.914 55.796,46.146 55.796,47.196 56.039,47.438 56.324,47.438 56.443,47.558 v1(56.515,47.558)
  Bottom_6 w0.134: R116.1@55.888,45.72 55.958,45.789 55.958,45.827 56.045,45.914 56.303,45.914 56.432,45.785 v1(56.504,45.785) 56.576,45.785 56.705,45.914 62.731,45.914 66.176,42.469 66.176,11.56 67.471,10.265 68.651,9.085 84.384,9.085 86.677,11.378 86.677,19.822 86.418,20.081 85.321,20.081 85.242,20.16 85.242,20.468 85.009,20.701 J7.7@84.809,20.701 ; R118.1@55.888,47.625 55.958,47.556 55.958,47.518 56.038,47.438 56.324,47.438
FLEXCOM1_I2C_SCL: J7.6 R43.2 R83.2 R231.2 R241.1 | length 166.2
  SIGNAL_3 w0.1: v1(21.774,52.203) 31.25,52.203 34.531,55.485 40.525,55.485 v1(41.539,56.498)
  Bottom_6 w0.1: R231.2@14.801,64.516 14.855,64.462 15.167,64.462 21.222,58.407 21.222,53.273 21.777,52.717 v1@21.777,52.207 ; v1(21.774,52.203) 21.774,45.411 21.222,44.858 21.222,35.166 24.555,31.833 24.555,11.511 26.671,9.394 32.093,9.394 32.269,9.57 32.269,10.023 32.132,10.161 ; R241.1@31.311,10.16 32.131,10.16 ; R83.2@41.021,54.364 R43.2@41.021,54.983 41.033,54.983 41.539,55.488 v1(41.539,56.498) ; J7.6@84.809,22.201 85.6,22.201 86.259,22.86 87.14,22.86 87.401,22.599 87.401,11.468 84.639,8.706 68.002,8.706 63.5,13.208 33.804,13.208 32.312,11.716 32.312,10.341 32.131,10.16
FLEXCOM1_I2C_SDA: J7.5 R36.2 R84.2 R229.2 R238.1 | length 153.1
  SIGNAL_3 w0.1: v1(21.389,51.553) 21.393,51.557 30.221,51.557 v1(30.226,51.562)
  Bottom_6 w0.1: R229.2@14.801,63.5 15.748,63.5 20.916,58.332 20.916,53.101 21.395,52.622 21.395,51.56 v1(21.389,51.553) 21.395,51.546 21.395,45.44 20.916,44.961 20.916,35.019 24.223,31.712 24.223,11.494 26.522,9.194 32.181,9.194 32.501,9.514 32.501,10.02 32.664,10.183 ; v1(30.226,51.562) R84.2@31.234,51.562 R36.2@31.234,52.197 ; 32.66,10.16 R238.1@33.459,10.16 ; 32.688,10.16 32.512,10.336 32.512,11.557 33.909,12.954 63.395,12.954 67.899,8.449 84.742,8.449 87.601,11.308 87.601,22.759 87.245,23.114 86.22,23.114 85.633,23.701 J7.5@84.809,23.701
FLEXCOM2_SPI_CLK: R121.2 U17.5 | length 65.4
  Top_1 w0.134: v1(69.373,78.277) 69.373,79.151 U17.5@69.383,79.161
  SIGNAL_3 w0.134: v1(39.878,31.496) 40.375,31.993 47.317,31.993 54.352,39.028 54.352,47.458 70.314,63.42 70.314,76.828 69.373,77.768 v1(69.373,78.277)
  Bottom_6 w0.134: v1(39.878,31.496) R121.2@39.878,32.123
FLEXCOM2_SPI_MISO: R123.2 U16.5 | length 63.2
  Top_1 w0.127: v1(60.745,78.45) 60.745,79.159 U16.5@60.747,79.161
  SIGNAL_3 w0.127: v1(38.561,31.478) 39.499,32.416 47.27,32.416 53.721,38.868 53.721,72.009 57.15,75.438 57.15,76.835 58.765,78.45 v1(60.745,78.45)
  Bottom_6 w0.127: v1(38.561,31.478) 38.561,32.075 R123.2@38.608,32.123
FLEXCOM3_UART_RX: R63.2 U20.1 | length 75.7
  Top_1 w0.127: R63.2@42.418,32.114 42.418,17.631 44.219,15.83 62.876,15.83 64.917,17.872 64.917,41.676 v1(65.405,42.164) ; U20.1@59.506,50.902 59.515,50.911 v1(59.515,51.618)
  SIGNAL_3 w0.127: v1(59.515,51.618) 59.515,48.772 65.405,42.882 v1(65.405,42.164)
FLEXCOM3_UART_TX: R65.2 U20.4 | length 75.9
  Top_1 w0.127: v1(57.227,48.947) 59.502,48.947 U20.4@59.506,48.951
  SIGNAL_3 w0.127: v1(57.227,48.947) 58.622,48.947 v1(64.897,42.672)
  Bottom_6 w0.127: R65.2@42.418,32.114 42.418,17.631 44.219,15.83 62.876,15.83 64.897,17.851 v1(64.897,42.672)
FLEXCOM4_I2C_SCL: J12.05 R45.1 R56.2 | length 45.2
  Top_1 w0.134: J12.05@14.83,15.1 14.843,15.113 v1(16.383,15.113)
  SIGNAL_3 w0.134: v1(16.383,15.113) 16.764,14.732 40.386,14.732 43.008,17.354 v1(43.008,31.326)
  Bottom_6 w0.134: v1(16.383,15.113) R45.1@17.33,15.113 R45.1@17.33,15.138 ; v1(43.008,31.326) 43.03,31.349 43.03,32.1 R56.2@43.053,32.123
FLEXCOM4_I2C_SDA: J12.06 R47.1 R58.2 | length 47.8
  Top_1 w0.134: J12.06@14.83,16.1 14.859,16.129 v1(16.383,16.129) ; v1(38.581,30.755) 38.586,30.755 38.952,31.121 38.952,31.779 38.69,32.041 38.69,32.052 38.62,32.123 R58.2@38.608,32.123
  SIGNAL_3 w0.134: v1(16.383,16.129) 17.046,15.466 40.485,15.466 42.593,17.574 42.593,29.239 41.74,30.092 39.244,30.092 v1(38.581,30.755)
  Bottom_6 w0.134: v1(16.383,16.129) R47.1@17.33,16.129
FLEXCOM5_I2C_SCL: R57.2 R97.2 R230.1 | length 33.6
  SIGNAL_3 w0.1: v1(16.002,67.183) 18.034,65.151 18.034,62.611 21.336,59.309 37.211,59.309 v1(37.846,58.674)
  Bottom_6 w0.1: R230.1@14.801,67.183 v1(16.002,67.183) ; v1(37.846,58.674) 38.608,58.674 38.825,58.457 38.825,55.896 39.738,54.983 R57.2@39.751,54.983 R97.2@39.751,54.364
FLEXCOM5_I2C_SDA: R54.2 R95.2 R228.1 | length 32.2
  SIGNAL_3 w0.1: v1(15.995,66.191) 15.61,65.805 15.61,63.507 20.945,58.172 20.945,48.905 21.844,48.006 v1(29.464,48.006)
  Bottom_6 w0.1: R228.1@14.801,66.167 14.825,66.191 v1(15.995,66.191) ; v1(29.464,48.006) R95.2@31.234,48.006 R54.2@31.234,48.641
FLEXCOM6_UART_TX: J14.14 R72.2 R226.1 | length 29.5
  Top_1 w0.127: v1(16.129,62.103) 17.236,63.21 J14.14@18.837,63.21 20.63,63.21 22.647,61.193 22.647,50.545 23.883,49.309 28.843,49.309 30.4,47.752 R72.2@31.234,47.752
  Bottom_6 w0.1: R226.1@14.801,62.131 14.829,62.103 v1(16.129,62.103)
FLEXCOM7_UART_RX: J14.11 R86.2 | length 32.6
  Top_1 w0.1: J14.11@14.393,65.21 14.429,65.174 v1(16.27,65.174) ; R86.2@39.751,54.373 39.751,55.293 v1(40.317,55.859)
  SIGNAL_3 w0.1: v1@16.27,65.171 16.27,63.371 23.782,55.859 v1(40.317,55.859)
FLEXCOM7_UART_TX: J14.12 R85.2 | length 32.5
  Top_1 w0.125: v1(17.018,65.151) 18.778,65.151 J14.12@18.837,65.21 ; R85.2@40.386,54.364 40.398,54.364 40.749,54.715 40.749,55.427 40.718,55.458 40.718,56.244 v1(40.67,56.292)
  SIGNAL_3 w0.125: v1(17.018,65.151) 17.018,63.135 23.86,56.292 v1(40.67,56.292)
FLEXCOM8_SPI_CK: R33.2 U15.5 | length 61.8
  Top_1 w0.127: v1(61.849,76.454) 62.055,77.113 U15.5@62.513,77.261
  SIGNAL_3 w0.127: v1(30.395,46.101) 32.639,48.345 32.639,51.398 35.295,54.054 41.096,54.054 43.025,55.983 48.982,55.983 52.07,59.071 52.07,77.851 53.033,78.814 61.229,78.814 61.849,78.194 v1(61.849,76.454)
  Bottom_6 w0.127: v1(30.395,46.101) R33.2@31.234,46.101
FLEXCOM8_SPI_MOSI: R73.2 U14.5 | length 50.1
  SIGNAL_3 w0.127: v1(30.48,44.196) 31.242,44.196 33.235,46.189 33.235,51.066 35.649,53.48 41.31,53.48 43.367,55.538 49.262,55.538 52.578,58.853 v1(52.578,77.216)
  Bottom_6 w0.127: v1(30.48,44.196) R73.2@31.234,44.196
FLEXCOM9_UART_RX_DEBUG: J3.3 R82.2 R160.2 | length 33.9
  Top_1 w0.134: R82.2@47.752,54.364 47.752,55.71 v1(48.603,56.561)
  SIGNAL_3 w0.134: v1(46.932,79.858) 51.054,75.736 51.054,58.98 48.635,56.561 v1(48.603,56.561)
  Bottom_6 w0.134: R160.2@45.085,79.814 45.094,79.823 45.163,79.823 R160.2@45.176,79.836 ; J3.3@45.151,82.825 45.151,82.425 45.484,82.092 45.735,81.841 45.735,80.396 R160.2@45.176,79.836 ; v1(46.932,79.858) 46.91,79.836 R160.2@45.176,79.836
FLEXCOM9_UART_TX_DEBUG: J3.2 R80.2 R159.2 | length 34.8
  Top_1 w0.134: R80.2@47.117,54.364 47.117,55.626 48.621,57.131 v1(48.685,57.131)
  SIGNAL_3 w0.134: v1(46.939,79.197) 50.714,75.422 50.714,59.16 v1(48.685,57.131)
  Bottom_6 w0.134: R159.2@43.878,79.814 R159.2@43.903,79.814 ; J3.2@43.901,82.825 43.901,82.425 44.234,82.092 44.485,81.841 44.485,80.396 R159.2@43.903,79.814 ; v1(46.939,79.197) 46.913,79.171 44.546,79.171 R159.2@43.903,79.814
FLEXCOM10_I2C_SCL: R5.2 R42.2 R51.2 U1.6 U2.4 U12.4 | length 76.5
  Top_1 w0.134: v1(46.663,61.152) 46.237,60.727 46.237,60.158 51.023,55.372 58.855,55.372 v1(59.31,55.827)
  SIGNAL_3 w0.127: v1(59.31,55.827) 63.832,60.349 63.832,64.084 64.244,64.496 64.244,72.653 v1(62.135,74.762)
  Bottom_6 w0.127: v1(59.31,55.827) 59.319,55.827 60.144,56.651 R5.2@60.144,56.668 60.144,56.733 60.452,57.041 U2.4@60.452,58.192 ; U1.6@62.106,73.493 62.12,73.508 62.12,74.747 v1(62.135,74.762)
  Bottom_6 w0.134: R42.2@31.234,50.292 29.362,50.292 29.284,50.371 29.284,59.179 29.362,59.258 48.165,59.258 48.532,59.625 48.532,60.291 ; v1(46.663,61.152) 47.558,61.152 U12.4@47.582,61.176 48.192,61.176 48.532,60.836 48.532,60.291 ; R51.2@49.207,60.325 49.173,60.291 48.532,60.291
FLEXCOM10_I2C_SDA: R4.2 R40.2 R52.2 U1.5 U2.5 U12.5 | length 80
  Top_1 w0.134: v1(46.678,60.368) 51.227,55.818 v1(58.27,55.818)
  SIGNAL_3 w0.127: v1(58.27,55.818) 58.604,55.818 63.51,60.725 63.51,64.227 63.907,64.624 63.907,72.476 v1@61.595,74.788
  Bottom_6 w0.127: v1(58.27,55.818) 58.254,55.834 58.254,56.652 R4.2@58.239,56.668 58.239,58.817 58.638,59.217 U2.5@59.427,59.217 ; v1(61.589,74.762) 61.597,74.753 61.597,73.502 U1.5@61.606,73.493
  Bottom_6 w0.134: R40.2@31.234,43.561 30.234,43.561 28.941,44.854 28.941,59.472 29.058,59.589 43.786,59.589 ; R52.2@43.757,60.325 43.786,60.296 43.786,59.589 ; v1(46.678,60.368) 47.574,60.368 U12.5@47.582,60.376 47.582,59.773 47.398,59.589 43.786,59.589
FLT#: R201.1 U22.4 | length 2
  Bottom_6 w0.254: R201.1@73.454,73.577 73.454,73.558 73.602,73.411 73.726,73.411 74.835,72.302 U22.4@74.895,72.302